# Altium PCB PCB_prob_2024-08-23.pcbdoc
Units mil, origin at the board's own origin, x right, y up, seen from the top; angles counter-clockwise.
Board outline 12910 x 4910 mil, 2 copper layers (Top Layer, Bottom Layer); 57 components, 34 nets, 213 pads, 14 vias.
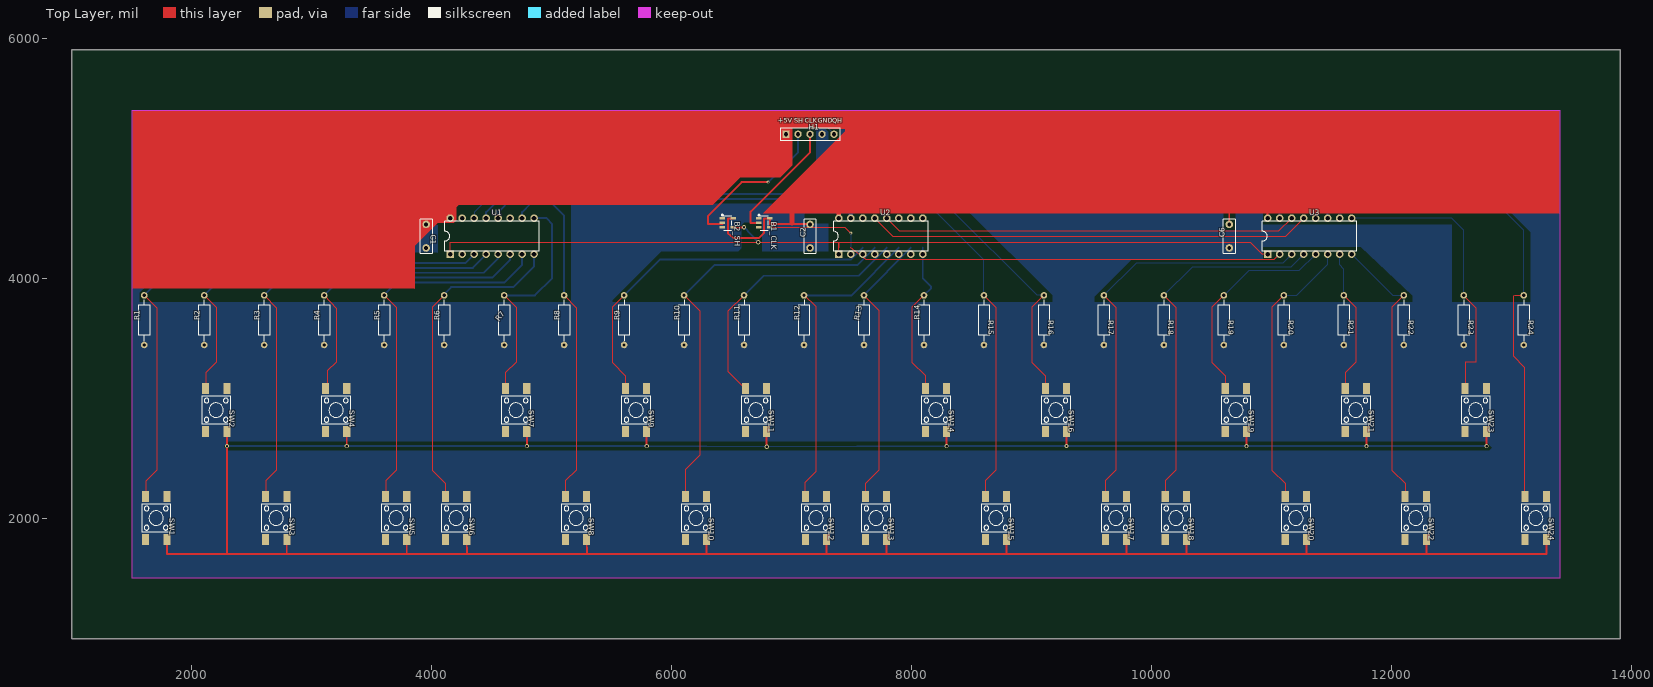
[diagram p0: Top Layer view]
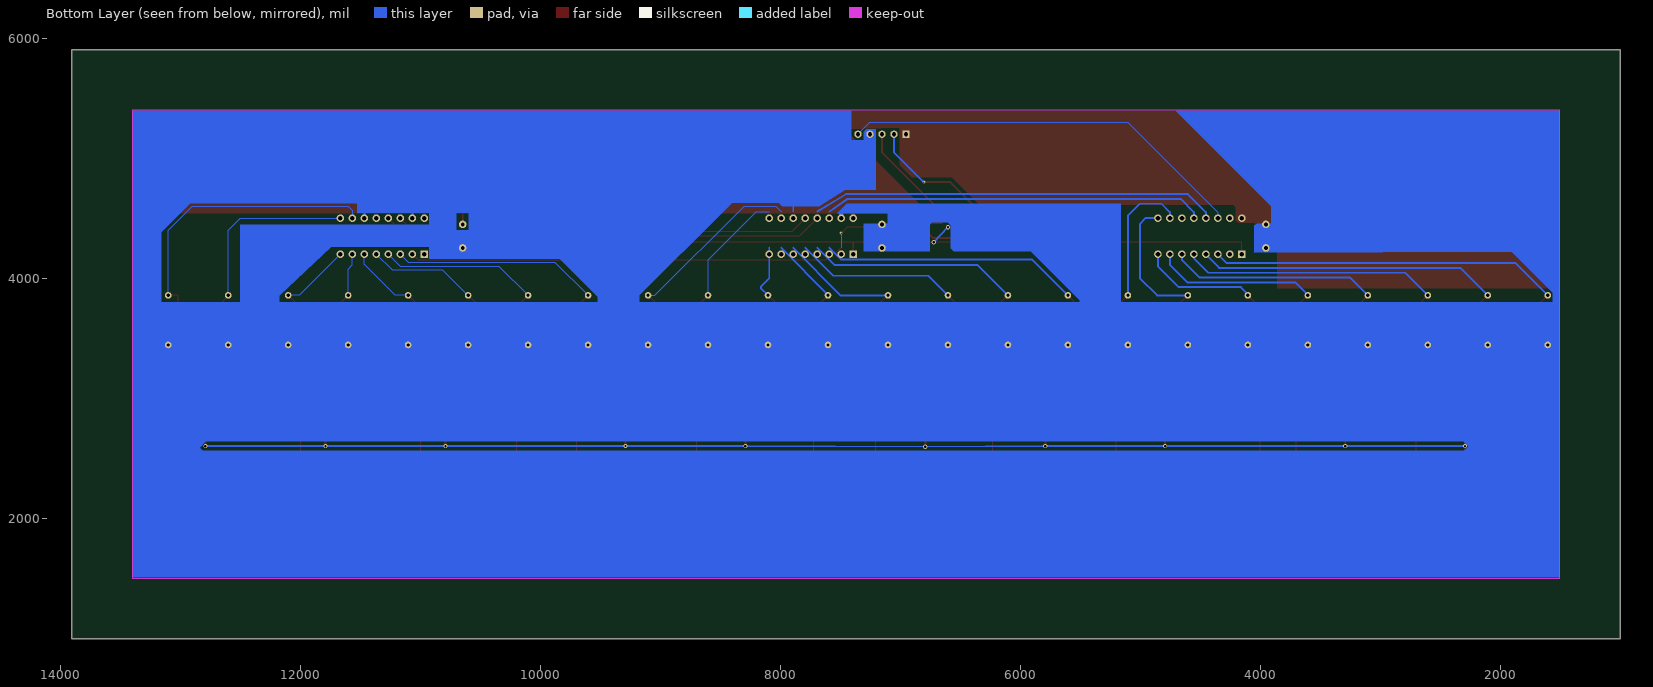
[diagram p1: Bottom Layer view, seen from below]

## Layer stack, top to bottom
Top Layer: signal copper (thickness not stored)
Dielectric: dielectric 12.6, FR-4, Dk 4.8
Bottom Layer: signal copper (thickness not stored)

## Board outline
13910,1000 1000,1000 1000,5910 13910,5910

## Components (designator, comment, footprint, x,y, rotation, side; value= is the part's Value field where it differs from the comment)
B1_CLK "SN74LVC1G125DBVR" SOT-23-5_L3.0-W1.7-P0.95-LS2.8-BL 6775,4466.02 r270 top
B2_SH "SN74LVC1G125DBVR" SOT-23-5_L3.0-W1.7-P0.95-LS2.8-BL 6470,4466.02 r270 top
C1 "100nF" CAP-TH_L7.2-W2.5-P5.00-D0.5 3955,4355 r270 top
C2 "100nF" CAP-TH_L7.2-W2.5-P5.00-D0.5 7155,4355 r90 top
C6 "100nF" CAP-TH_L7.2-W2.5-P5.00-D0.5 10650,4355 r90 top
H1 "HDR-F-2.54_1x5" HDR-F-2.54_1X5 7155,5205 r0 top
R1 "110kΩ" RES-TH_BD2.3-L6.5-P10.50-D0.5 1605,3655 r90 top
R2 "110kΩ" RES-TH_BD2.3-L6.5-P10.50-D0.5 2105,3655 r90 top
R3 "110kΩ" RES-TH_BD2.3-L6.5-P10.50-D0.5 2605,3655 r90 top
R4 "110kΩ" RES-TH_BD2.3-L6.5-P10.50-D0.5 3105,3655 r90 top
R5 "110kΩ" RES-TH_BD2.3-L6.5-P10.50-D0.5 3605,3655 r90 top
R6 "110kΩ" RES-TH_BD2.3-L6.5-P10.50-D0.5 4105,3655 r90 top
R7 "110kΩ" RES-TH_BD2.3-L6.5-P10.50-D0.5 4605,3655 r90 top
R8 "110kΩ" RES-TH_BD2.3-L6.5-P10.50-D0.5 5104.99,3655 r90 top
R9 "110kΩ" RES-TH_BD2.3-L6.5-P10.50-D0.5 5605,3655 r270 top
R10 "110kΩ" RES-TH_BD2.3-L6.5-P10.50-D0.5 6105,3655 r270 top
R11 "110kΩ" RES-TH_BD2.3-L6.5-P10.50-D0.5 6605,3655 r270 top
R12 "110kΩ" RES-TH_BD2.3-L6.5-P10.50-D0.5 7105,3655 r270 top
R13 "110kΩ" RES-TH_BD2.3-L6.5-P10.50-D0.5 7605,3655 r270 top
R14 "110kΩ" RES-TH_BD2.3-L6.5-P10.50-D0.5 8105,3655 r270 top
R15 "110kΩ" RES-TH_BD2.3-L6.5-P10.50-D0.5 8605,3655 r270 top
R16 "110kΩ" RES-TH_BD2.3-L6.5-P10.50-D0.5 9105,3655 r270 top
R17 "110kΩ" RES-TH_BD2.3-L6.5-P10.50-D0.5 9605,3655 r270 top
R18 "110kΩ" RES-TH_BD2.3-L6.5-P10.50-D0.5 10105,3655 r270 top
R19 "110kΩ" RES-TH_BD2.3-L6.5-P10.50-D0.5 10605,3655 r270 top
R20 "110kΩ" RES-TH_BD2.3-L6.5-P10.50-D0.5 11105,3655 r270 top
R21 "110kΩ" RES-TH_BD2.3-L6.5-P10.50-D0.5 11604.98,3655 r270 top
R22 "110kΩ" RES-TH_BD2.3-L6.5-P10.50-D0.5 12104.98,3655 r270 top
R23 "110kΩ" RES-TH_BD2.3-L6.5-P10.50-D0.5 12604.98,3655 r270 top
R24 "110kΩ" RES-TH_BD2.3-L6.5-P10.50-D0.5 13104.98,3655 r270 top
SW1 "SW" SW-SMD_4P-L6.0-W6.0-P4.50-LS9.0-2 1705,2005 r270 top
SW2 "SW" SW-SMD_4P-L6.0-W6.0-P4.50-LS9.0-2 2205,2905 r270 top
SW3 "SW" SW-SMD_4P-L6.0-W6.0-P4.50-LS9.0-2 2705,2005 r270 top
SW4 "SW" SW-SMD_4P-L6.0-W6.0-P4.50-LS9.0-2 3205,2905 r270 top
SW5 "SW" SW-SMD_4P-L6.0-W6.0-P4.50-LS9.0-2 3705,2005 r270 top
SW6 "SW" SW-SMD_4P-L6.0-W6.0-P4.50-LS9.0-2 4205,2005 r270 top
SW7 "SW" SW-SMD_4P-L6.0-W6.0-P4.50-LS9.0-2 4705,2905 r270 top
SW8 "SW" SW-SMD_4P-L6.0-W6.0-P4.50-LS9.0-2 5205,2005 r270 top
SW9 "SW" SW-SMD_4P-L6.0-W6.0-P4.50-LS9.0-2 5705,2905 r270 top
SW10 "SW" SW-SMD_4P-L6.0-W6.0-P4.50-LS9.0-2 6205,2005 r270 top
SW11 "SW" SW-SMD_4P-L6.0-W6.0-P4.50-LS9.0-2 6705,2905 r270 top
SW12 "SW" SW-SMD_4P-L6.0-W6.0-P4.50-LS9.0-2 7205,2005 r270 top
SW13 "SW" SW-SMD_4P-L6.0-W6.0-P4.50-LS9.0-2 7705,2005 r270 top
SW14 "SW" SW-SMD_4P-L6.0-W6.0-P4.50-LS9.0-2 8205,2905 r270 top
SW15 "SW" SW-SMD_4P-L6.0-W6.0-P4.50-LS9.0-2 8705,2005 r270 top
SW16 "SW" SW-SMD_4P-L6.0-W6.0-P4.50-LS9.0-2 9205,2905 r270 top
SW17 "SW" SW-SMD_4P-L6.0-W6.0-P4.50-LS9.0-2 9705,2005 r270 top
SW18 "SW" SW-SMD_4P-L6.0-W6.0-P4.50-LS9.0-2 10205,2005 r270 top
SW19 "SW" SW-SMD_4P-L6.0-W6.0-P4.50-LS9.0-2 10705,2905 r270 top
SW20 "SW" SW-SMD_4P-L6.0-W6.0-P4.50-LS9.0-2 11205,2005 r270 top
SW21 "SW" SW-SMD_4P-L6.0-W6.0-P4.50-LS9.0-2 11704.98,2905 r270 top
SW22 "SW" SW-SMD_4P-L6.0-W6.0-P4.50-LS9.0-2 12204.98,2005 r270 top
SW23 "SW" SW-SMD_4P-L6.0-W6.0-P4.50-LS9.0-2 12704.98,2905 r270 top
SW24 "SW" SW-SMD_4P-L6.0-W6.0-P4.50-LS9.0-2 13204.98,2005 r270 top
U1 "SN74HC165N" DIP-16_L19.8-W6.5-P2.54-LS7.6-BL 4505,4355 r0 top
U2 "SN74HC165N" DIP-16_L19.8-W6.5-P2.54-LS7.6-BL 7745,4355 r0 top
U3 "SN74HC165N" DIP-16_L19.8-W6.5-P2.54-LS7.6-BL 11320,4355 r0 top

## Footprints (in the part's own frame and the unit in brackets; to place one, negate y for a bottom-side part, rotate by r counter-clockwise, add the part's x,y. Pads: shape width x height; smd on the part's side, far side on the other; paste and mask are expansions set on the pad)
CAP-TH_L7.2-W2.5-P5.00-D0.5 [mm]
  round 1.6 hole 0.8 paste+0 mask+0.05: 1(-2.5,0) 2(2.5,0)
  silkscreen extent -3.6,-1.25 3.6,1.25
DIP-16_L19.8-W6.5-P2.54-LS7.6-BL [mm]
  rect 1.6x1.6 hole 1 paste+0 mask+0.051: 1(-8.89,-3.81)
  round 1.6 hole 1 paste+0 mask+0.051: 2(-6.35,-3.81) 3(-3.81,-3.81) 4(-1.27,-3.81) 5(1.27,-3.81) 6(3.81,-3.81) 7(6.35,-3.81) 8(8.89,-3.81) 9(8.89,3.81) 10(6.35,3.81) 11(3.81,3.81) 12(1.27,3.81) 13(-1.27,3.81) 14(-3.81,3.81) 15(-6.35,3.81) 16(-8.89,3.81)
  silkscreen extent -10,-3.2 10,3.2
HDR-F-2.54_1X5 [mil]
  rect 62x62 hole 35 paste+0 mask+2: 1(-200,0)
  round 62 hole 35 paste+0 mask+2: 2(-100,0) 3(0,0) 4(100,0) 5(200,0)
  silkscreen extent -250,-50 250,50
RES-TH_BD2.3-L6.5-P10.50-D0.5 [mm]
  round 1.4 hole 0.7 paste+0 mask+0.051: 1(-5.25,0) 2(5.25,0)
  silkscreen extent -4.32,-1.15 4.32,1.15
SOT-23-5_L3.0-W1.7-P0.95-LS2.8-BL [mm]
  rect 0.49x1.157 smd paste+0 mask+0.051: 1(-0.95,-1.154) 2(0,-1.154) 3(0.95,-1.154)
  rect 0.49x1.175 smd paste+0 mask+0.051: 4(0.95,1.154) 5(-0.95,1.154)
  silkscreen extent -1.8,-1.29 1.53,0.85
SW-SMD_4P-L6.0-W6.0-P4.50-LS9.0-2 [mm]
  rect 2.3x1.5 smd paste+0 mask+0.051: 1(-4.55,2.25) 2(4.55,2.25) 3(-4.55,-2.25) 4(4.55,-2.25)
  silkscreen extent -3,-3 3,3

## Via types
v1: diameter 35.43, hole 19.69, Top Layer to Bottom Layer, tented both sides, 12 vias
v2: diameter 24.41, hole 12.2, Top Layer to Bottom Layer, tented both sides, 2 vias

## Nets (pads, with @x,y where several pads share a name; then routed paths per layer and width w, separated by ;. In a path a pad name is that pad's centre, name@x,y a point inside that pad or via, vN(x,y) a via of type N, cw(c..) or ccw(c..) an arc to the next point about the centre after c; other vN are vias at no path point)
CLK: B1_CLK.2 H1.3 | length 1015
  Top Layer w15.75: B1_CLK.2 6661.02,4466.02 6660,4465 6660,4560 7155,5055 H1.3
CLK_OUT: B1_CLK.4 U1.2 U2.2 U3.2 | length 4444.7
  Top Layer w9.88: B1_CLK.4 7446.38,4428.62 v2(7495,4380)
  Top Layer w10: 7495,4260 7624,4158.2 11022.6,4157.6 U3.2
  Bottom Layer w9.88: 7495,4260 v2(7495,4380)
GND_PORT: B1_CLK.1 B1_CLK.3 B2_SH.1 B2_SH.3 C1.2 C2.1 C6.1 H1.4 R1.1 R2.1 R3.1 R4.1 R5.1 R6.1 R7.1 R8.1 R9.2 R10.2 R11.2 R12.2 R13.2 R14.2 R15.2 R16.2 R17.2 R18.2 R19.2 R20.2 R21.2 R22.2 R23.2 R24.2 U1.11 U1.15 U2.11 U2.15 U3.11 U3.15 | length 827.8
  Bottom Layer w15.75: 7090,4615 7440,4615 7495,4560 ; 7895,4560 7895,4640 ; U3.15 11070,4645 ; U3.11 11470,4640
  Bottom Layer w39.37: U2.15 7495,4550
QH: H1.5 U1.14 | length 3402.1
  Bottom Layer w10: U1.14 4355,4555 5105,5305 7255,5305 H1.5
QH#: U1.13 U2.13 U3.13 | length 7091.8
  Top Layer w10: U2.13 7845,4355 11120,4355 U3.13
  Bottom Layer w15.75: U1.13 4455,4555 4605,4705 7455,4705 7695,4560
SH/LD#: B2_SH.2 H1.2 | length 1309.1
  Top Layer w15.75: 6424.58,4455 6305,4455 6305,4525 6585,4805 v2(6805,4805)
  Bottom Layer w15.75: v2(6805,4805) 7055,5055 H1.2
SH/LD#_OUT: B2_SH.4 U1.1 U2.1 U3.1 | length 7362.2
  Top Layer w10: U1.1 4155,4305 v1(6722.95,4305) 7395,4305 ; U2.1 7395,4305 ; 7395,4260 7395,4305 ; U3.1 10925.61,4205 10825.6,4305 7395,4305
  Top Layer w15.75: B2_SH.4 v1(6605,4428.62)
  Bottom Layer w15.75: v1@6605,4429 v1(6605,4428.62) v1(6722.95,4305)
U1: R1.2 SW1.3 U1.3 | length 4652
  Top Layer w10: R1.2 1710,3756.69 1710,2405 1616.42,2311.42 SW1.3
  Bottom Layer w15.75: R1.2 1873.3,4130 4280,4130 U1.3
U2: R2.2 SW2.3 U1.4 | length 3349.4
  Top Layer w10: R2.2 2205,3761.69 2205,3305 2116.42,3216.42 SW2.3
  Bottom Layer w15.75: R2.2 2333.3,4090 4345,4090 U1.4
U2_14: U1.12 U2.14 | length 3168.7
  Bottom Layer w15.75: U1.12 4555,4555 4665,4665 7445,4665 7595,4560
U3: R3.2 SW3.3 U1.5 | length 3867
  Top Layer w10: R3.2 2705,3756.7 2705,2405 2616.4,2316.4 SW3.3
  Bottom Layer w15.75: R3.2 2793.3,4050 4435,4050 4555,4170 U1.5
U3_14: U2.12 U3.14 | length 3466.1
  Top Layer w10: U2.12 7905,4395 11060,4395 U3.14
U4: R4.2 SW4.3 U1.6 | length 2566.1
  Top Layer w10: R4.2 3205,3755 3205,3305 3131.41,3231.41 SW4.3@3131.41,3084.13
  Bottom Layer w15.75: R4.2 3253.3,4010 4505,4010 4655,4160 U1.6
U5: R5.2 SW5.3 U1.7 | length 3105.6
  Top Layer w10: R5.2 3705,3761.69 3705,2405 3616.42,2316.42 SW5.3
  Bottom Layer w15.75: R5.2@3600,3861.7 3708.3,3970 4610,3970 4755,4115 U1.7
U6: R6.2 SW6.3 U1.8 | length 2704.7
  Top Layer w10: R6.2 4005,3761.7 4005,2405 4116.42,2293.58 SW6.3
  Bottom Layer w15.75: R6.2@4110,3876.7 4163.3,3930 4680,3930 4855,4105 U1.8
U7: R7.2 SW7.3 U1.9 | length 1937.3
  Top Layer w10: R7.2 4705,3761.68 4705,3305 4616.42,3216.42 SW7.3
  Bottom Layer w15.75: R7.2 4861.7,3861.7 5005,4005 5005,4455 4960,4505 U1.9
U8: R8.2 SW8.3 U1.10 | length 2888
  Top Layer w10: R8.2 5205,3756.68 5205,2405 5116.42,2316.42 SW8.3
  Bottom Layer w15.75: U1.10 4755,4555 4825,4625 5005,4625 5104.98,4525.02 R8.2
U9: R9.1 SW9.3 U2.3 | length 3019.9
  Top Layer w10: R9.1 5505,3761.69 5505,3305 5616.42,3193.58 SW9.3
  Bottom Layer w15.75: R9.1 5903.3,4160 7494.3,4160 7595,4260
U10: R10.1 SW10.3 U2.4 | length 3536.1
  Top Layer w10: R10.1 6235,3731.7 6235,2530 6115,2410 6115,2405 SW10.3
  Bottom Layer w15.75: R10.1 6356.61,4113.3 7548.3,4113.3 7695,4260
U11: R11.1 SW11.3 U2.5 | length 2245
  Top Layer w10: R11.1 6475,3731.7 6475,3225.5 SW11.3
  Bottom Layer w15.75: R11.1 6768.12,4024.81 7559.81,4024.81 7795,4260
U12: R12.1 SW12.3 U2.6 | length 2715.5
  Top Layer w10: R12.1 7205,3766.69 7205,2395 7115,2305 7115,2185.55 SW12.3
  Bottom Layer w15.75: R12.1 7500,3860 7895,4260
U13: R13.1 SW13.3 U2.7 | length 2333.8
  Top Layer w10: R13.1 7730,3736.69 7730,2405 7616.42,2291.42 SW13.3
  Bottom Layer w15.75: R13.1 7995,4260
U14: R14.1 SW14.3 U2.8 | length 1317.3
  Top Layer w10: R14.1 8005,3761.7 8005,3305 8115,3195 8115,3190 8116.42,3188.58 SW14.3
  Bottom Layer w15.75: 8095,4260 8095,4005 8165,3935 8165,3921.69 R14.1
U15: R15.1 SW15.3 U2.9 | length 2729.7
  Top Layer w10: R15.1 8705,3761.69 8705,2405 8616.42,2316.42 SW15.3
  Bottom Layer w10: 8095,4560 8205,4560 8605,4160 R15.1
U16: R16.1 SW16.3 U2.10 | length 2301.7
  Top Layer w10: R16.1 9005,3761.69 9005,3305 9116.42,3193.58 SW16.3
  Bottom Layer w10: 7995,4560 8040,4605 8305,4605 9048.31,3861.69 R16.1
U17: R17.1 SW17.3 U3.3 | length 3462.9
  Top Layer w10: R17.1 9705,3761.69 9705,2405 9616.42,2316.42 SW17.3
  Bottom Layer w10: R17.1 9877.04,4133.73 11098.73,4133.73 U3.3
U18: R18.1 SW18.3 U3.4 | length 3062.9
  Top Layer w10: R18.1 10205,3761.69 10205,2405 10116.42,2316.42 SW18.3
  Bottom Layer w10: R18.1 10344.92,4101.61 11166.61,4101.61 U3.4
U19: R19.1 SW19.3 U3.5 | length 1772.3
  Top Layer w10: R19.1 10505,3761.69 10505,3305 10616.42,3193.58 SW19.3
  Bottom Layer w10: R19.1 10606.69,3861.69 10815,4070 11235,4070 U3.5
U20: R20.1 SW20.3 U3.6 | length 2322.1
  Top Layer w10: R20.1 11005,3761.69 11005,2405 11116.42,2293.58 SW20.3
  Bottom Layer w10: R20.1 11211.69,3861.69 11470,4120 U3.6
U21: R21.1 SW21.3 U3.7 | length 1213.5
  Top Layer w10: R21.1 11705,3761.69 11705,3305 11616.42,3216.42 SW21.3
  Bottom Layer w10: U3.7 11570,4115 11605,4080 R21.1
U22: R22.1 SW22.3 U3.8 | length 2342.3
  Top Layer w10: R22.1 12005,3761.69 12005,2405 12116.42,2293.58 SW22.3
  Bottom Layer w10: U3.8 12013.31,3861.69 R22.1
U23: R23.1 SW23.3 U3.9 | length 2428.8
  Top Layer w10: R23.1@12605,3856.69 12705,3756.69 12705,3305 12615,3305 12616.42,3293.58 SW23.3
  Bottom Layer w10: U3.9 12505,4505 12605,4405 R23.1@12605,3856.69
U24: R24.1 SW24.3 U3.10 | length 4041.7
  Top Layer w10: R24.1 13028.31,3861.69 13020,3860 13020,3355 13115,3260 13115,2185.55 SW24.3
  Bottom Layer w10: U3.10 11570,4570 11605,4605 12905,4605 13105,4405 R24.1
VCC_PORT: B1_CLK.5 B2_SH.5 C1.1 C2.2 C6.2 H1.1 SW1.2 SW2.2 SW3.2 SW4.2 SW5.2 SW6.2 SW7.2 SW8.2 SW9.2 SW10.2 SW11.2 SW12.2 SW13.2 SW14.2 SW15.2 SW16.2 SW17.2 SW18.2 SW19.2 SW20.2 SW21.2 SW22.2 SW23.2 SW24.2 U1.16 U2.16 U3.16 | length 35801.1
  Top Layer w15.75: SW1.2 1795,1824.45 1795,1705 2795,1705 ; SW2.2 v1@2293.58,2605 ; 2295.99,1705 v1@2295.99,2602.59 ; SW3.2 2793.58,1706.42 2795,1705 ; v1(3293.58,2605) SW4.2 ; SW5.2 3793.58,1706.42 3795,1705 ; 4155,4555 4805,5205 H1.1 ; SW6.2 4295,1705 ; SW7.2 4795,2724.45 v1(4795,2605) ; SW8.2 5295,1705 ; v1(5793.57,2605) SW9.2 ; SW10.2 6293.58,1706.42 6295,1705 ; B2_SH.5 6470,4503.42 6470,4380 6515,4340 6730,4340 6770,4380 6770,4503.42 B1_CLK.5 ; v1(6793.57,2600) SW11.2 ; B1_CLK.5@6820.4,4502.4 6820.4,4455 C2.2@7155,4455 ; SW12.2 7293.58,1706.42 7295,1705 ; 7465,5204.88 10305.12,5204.88 10805,4705 10805,4605 ; SW13.2 7793.58,1708.58 7790,1705 ; v1(8293.57,2605) SW14.2 ; SW15.2 8793.58,1706.42 8795,1705 ; v1(9293.58,2606.42) SW16.2 ; SW17.2@9793.58,1820.87 9793.58,1706.42 9795,1705 ; SW18.2 10293.58,1706.42 10295,1705 ; C6.2 10650,4550 10705,4605 10935,4605 10970,4570 U3.16 ; v1(10793.56,2605) SW19.2 ; SW20.2 11293.58,1711.42 11300,1705 10295,1705 ; 11297.2,1705 12295,1705 ; SW21.2@11793.5,2725.9 v1(11793.56,2605) ; SW22.2 12293.58,1706.42 12295,1705 ; SW23.2 12795,2724.45 v1(12795,2605) ; SW24.2 13293.58,1706.42 13295,1705 12295,1705 ; v1@2293.58,2605 v1@2295.99,2602.59 ; v1@2293.58,2605 v1@2295.99,2602.59 ; 2795,1705 3795,1705 ; 3795,1705 4295,1705 ; 4295,1705 5295,1705 ; 5295,1705 6295,1705 ; 6295,1705 7295,1705 ; 7295,1705 7790,1705 ; 7790,1705 8795,1705 ; 8795,1705 8800,1705 9795,1705 ; 9795,1705 9800,1705 10295,1705
  Top Layer w39.37: H1.1 6955,5280 7000,5325 7425,5325 7465,5285 7465,5055 7005,4595 7005,4465 ; U2.16 7395,4570
  Bottom Layer w15.75: v1@2295.99,2602.59 2298.4,2605 v1(3293.58,2605) v1(4795,2605) v1(5793.57,2605) ; v1@5795,2605 v1(6793.57,2600) v1(8293.57,2605) ; v1@8295,2605 v1(9293.58,2606.42) v1(10793.56,2605) ; v1@10795,2605 v1(11793.56,2605) v1(12795,2605)
  other v1: 2295,2605
pads on no net: SW1.1 SW1.4 SW2.1 SW2.4 SW3.1 SW3.4 SW4.1 SW4.4 SW5.1 SW5.4 SW6.1 SW6.4 SW7.1 SW7.4 SW8.1 SW8.4 SW9.1 SW9.4 SW10.1 SW10.4 SW11.1 SW11.4 SW12.1 SW12.4 SW13.1 SW13.4 SW14.1 SW14.4 SW15.1 SW15.4 SW16.1 SW16.4 SW17.1 SW17.4 SW18.1 SW18.4 SW19.1 SW19.4 SW20.1 SW20.4 SW21.1 SW21.4 SW22.1 SW22.4 SW23.1 SW23.4 SW24.1 SW24.4 U3.12

## Other copper
Top Layer:
  region net VCC_PORT: 6765,4545 7465,5245 7005,5260 7005,5400 13400,5400 13400,4545 6765,4545
  region net VCC_PORT: 3860,4275 3860,3915 3855,3920 1510,3920 1510,5400 7005,5400 7005,4945 6905,4845 6575,4845 6345,4615 4215,4615 4205,4605 4205,4485 4185,4465 4050,4465 3860,4275
Bottom Layer:
  region net GND_PORT: 7110,4625 7115,4620 7115,4545 7105,4545 7100,4550 7100,4625
  region net GND_PORT: 7115,4545 7530,4545 7450,4625 7110,4625
  region net GND_PORT: 10925,4450 12505,4450 12505,4380 12505,3795 12505,3755 12210,3755 12180,3800 12180,3860 11745,4265 10905,4265
  region net GND_PORT: 10870,4165 10930,4165 10930,4560 10870,4560 10865,4555
  region net GND_PORT: 10705,4550 10705,4405 10920,4405 10920,4550
  region net GND_PORT: 13165,4390 13165,3790 13390,3790 13400,3800 13400,4150 13395,4155
  region net GND_PORT: 12920,4630 13400,4150 13400,4630
  region net GND_PORT: 13400,5400 13105,5400 13400,5105
  region net GND_PORT: 7410,5155 7410,5400 13105,5400 13400,5105 13400,4630 10720,4630 10670,4680
  region net GND_PORT: 3760,4450 3760,4500 3775,4515 3795,4515 3840,4470
  region net GND_PORT: 3775,4455 3905,4455 3910,4460 3910,4610
  region net GND_PORT: 1875,4415 3730,4415 3905,4590 3905,4600
  region net GND_PORT: 1510,4205 1510,5400 4705,5400 3775,4470 1775,4470 1510,4205
  region net GND_PORT: 11530,4550 10585,4550 10585,4625 10595,4635 11525,4635 11530,4640
  region net GND_PORT: 10375,4635 10375,4630 10600,4405 10600,4630 10605,4635 10605,4645
  region net GND_PORT: 10080,4405 10310,4635 10375,4635 10605,4405 10600,4405 10595,4400
  region net GND_PORT: 9837.5,4165 10872.5,4165 10872.5,4405 10077.5,4405 10072.5,4405
  region net GND_PORT: 9180,3805 9235,3805 9230,3810 9185,3810
  region net GND_PORT: 9180,3850 9180,3860 9190,3850
  region net GND_PORT: 9180,3850 9195,3850 9235,3810 9185,3810 9180,3805 9180,3810
  region net GND_PORT: 8315,4635 8405,4635 9235,3805 9520,3805 9525,3810 9525,3850 10310,4635 10305,4640
  region net GND_PORT: 8015,4635 8120,4740 13290,4740 13400,4630
  region net GND_PORT: 1510,1510 1510,3810 13220,3805 13390,3805 12230,2645 2310,2645 2270,2605 2270,2600 2930,1940 2930,1510 1510,1510
  region net GND_PORT: 12841.58,2593.42 12790,2645 12230,2645 13390,3805 13400,3805 12841.58,2593.42
  region net GND_PORT: 13400,2035 13400,1510 12320,1510 12320,2070 12840,2590 12841.58,2593.42 13400,2035
  region net GND_PORT: 13400,3155 13400,2035 12840,2590 12840,2595 13400,3155
  region net GND_PORT: 13400,3805 13400,3155 12845,2600 12840,2595
  region net GND_PORT: 2305,2565 12835,2565 13160,2240 13050,2240 12320,1510 2880,1510
  region net GND_PORT: 4050,4215 4050,4445 4025,4460 1775,4470 1510,4205 1510,3805 1565,3805 1565,3885 1905,4225 1910,4225
  region net GND_PORT: 7305,4230 7305,4460 6985,4460 6755,4230 6760,4230
  region net GND_PORT: 6755,4230 6985,4460 6760,4460 6755,4465 6755,4460
  region net GND_PORT: 7105,4450 7105,4625 6035,4625 5205,3795 5495,3795 5505,3805 5505,3820 5915,4230 6555,4230 6580,4255 6580,4445 6605,4470 6735,4470 6765,4440 6765,4450 6760,4455
  region net GND_PORT: 6035,4625 5980,4625 5160,3805 5220,3805
  region net GND_PORT: 5165,3805 5165,4625 5985,4625 6000,4610
  region net GND_PORT: 7205,5245 7220,5245 7305,5160 7305,4840 7205,4740 7205,4745
  region net GND_PORT: 7220,5245 7305,5160 7305,5225 7285,5245 7275,5245
  region net GND_PORT: 7305,5160 7305,5150 7715,4740 10500,4740 10905,5145 10910,5145
  region net GND_PORT: 10500,4740 10725,4740 10910,4925 10910,5140 10905,5145
  region net GND_PORT: 7205,4740 7205,5050 7305,5150 7315,5150 7725,4740 7705,4740
  region net GND_PORT: 7500,4740 7460,4740 7680,4605 7975,4605 7985,4605 8155,4775

## Silkscreen, mask and mechanical layers (free items; w line width, h text height)
Top Overlay:
  text "+5V" at 6890,5300.31 h39.37
  text "SH" at 7025,5300.31 h39.37
  text "CLK" at 7110,5300.31 h39.37
  text "GND" at 7220,5300.31 h39.37
  text "QH" at 7340,5300.31 h39.37